# Altium PCB PCB1.PcbDoc
Units mil, origin at the board's own origin, x right, y up, seen from the top; angles counter-clockwise.
Board outline 3458.09 x 3082.9 mil, 2 copper layers (Top Layer, Bottom Layer); 35 components, 1 nets, 214 pads, 5 vias.
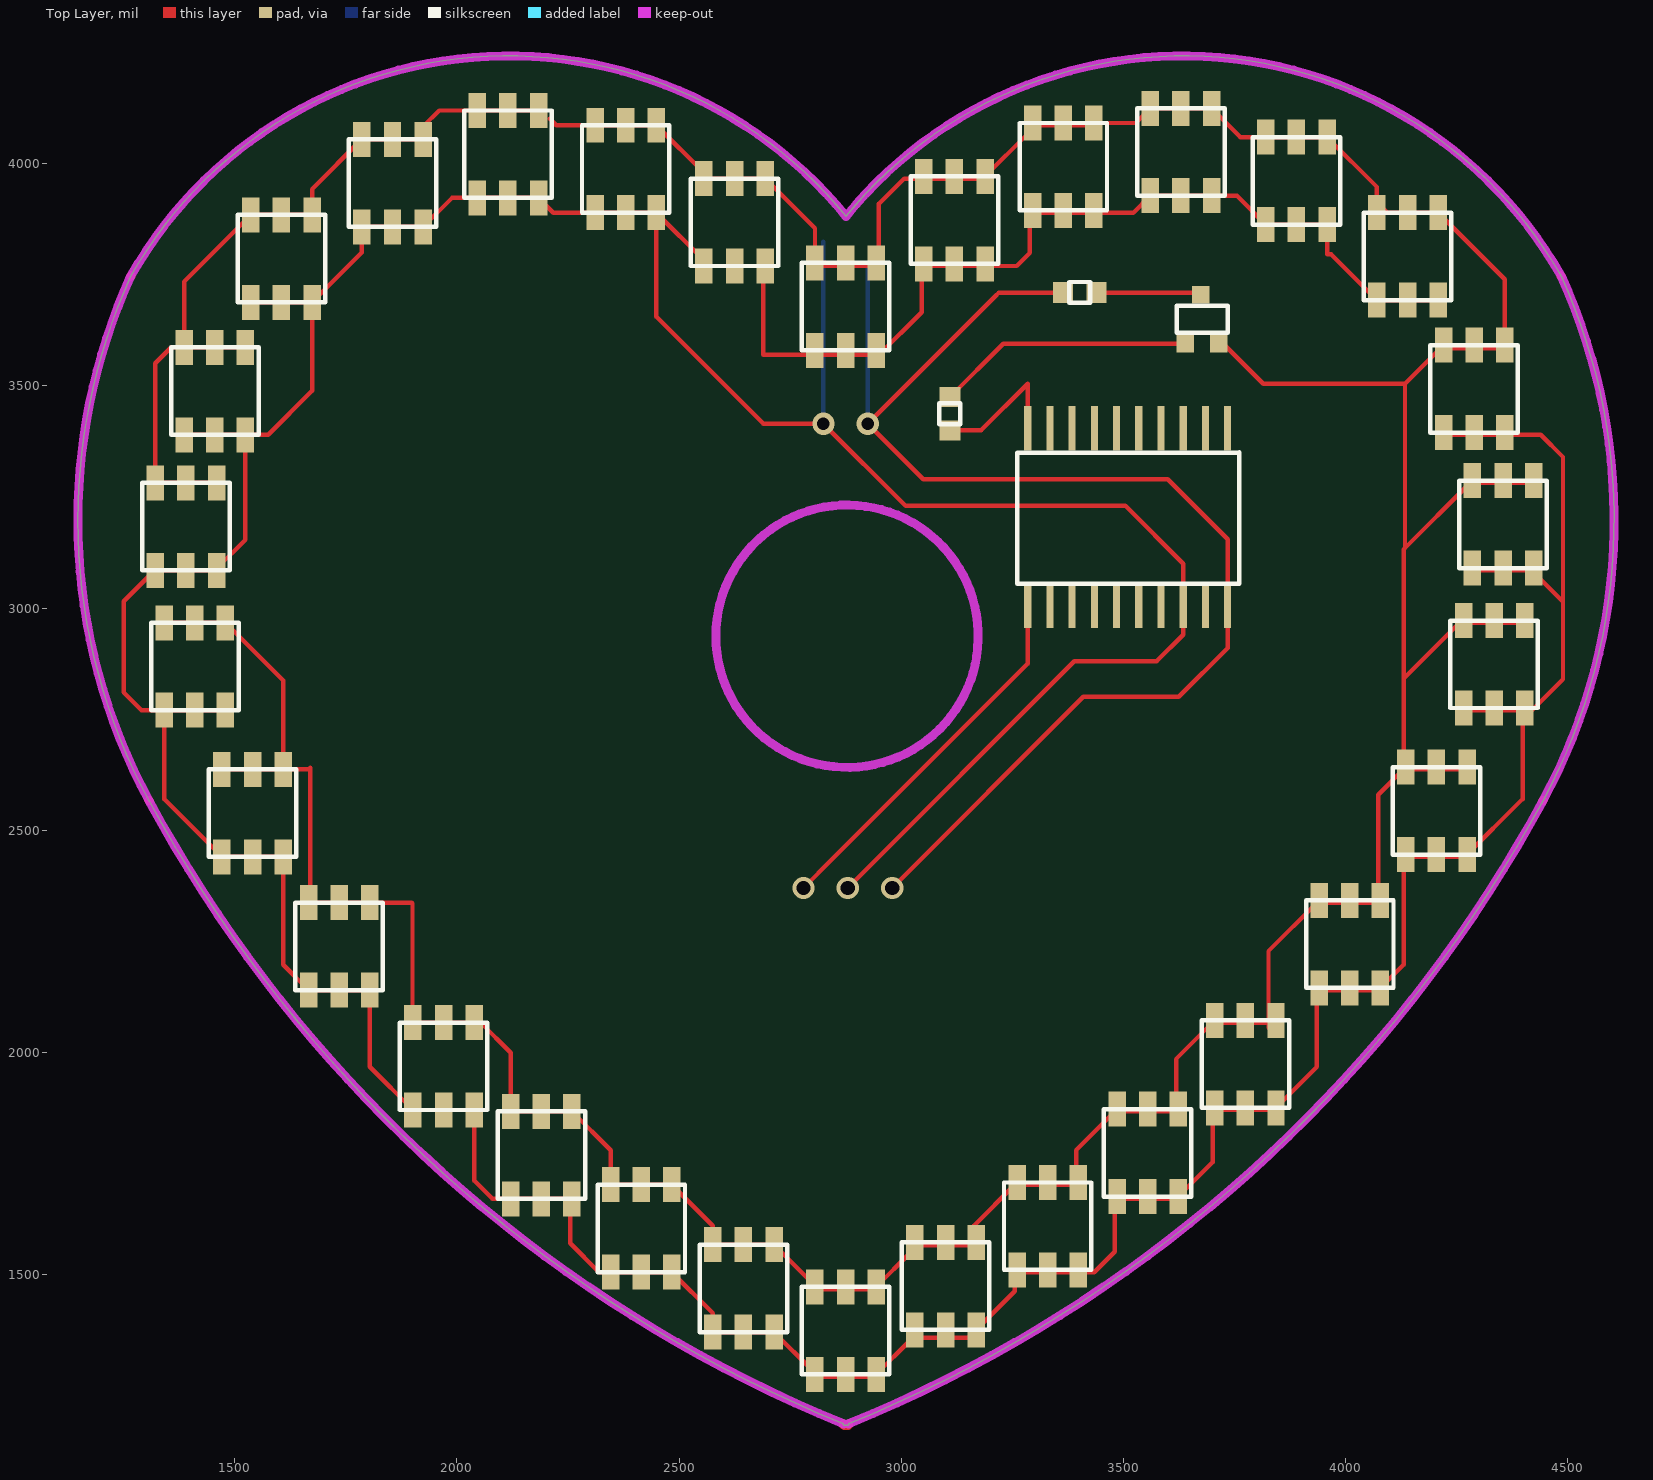
[diagram p0: Top Layer view]
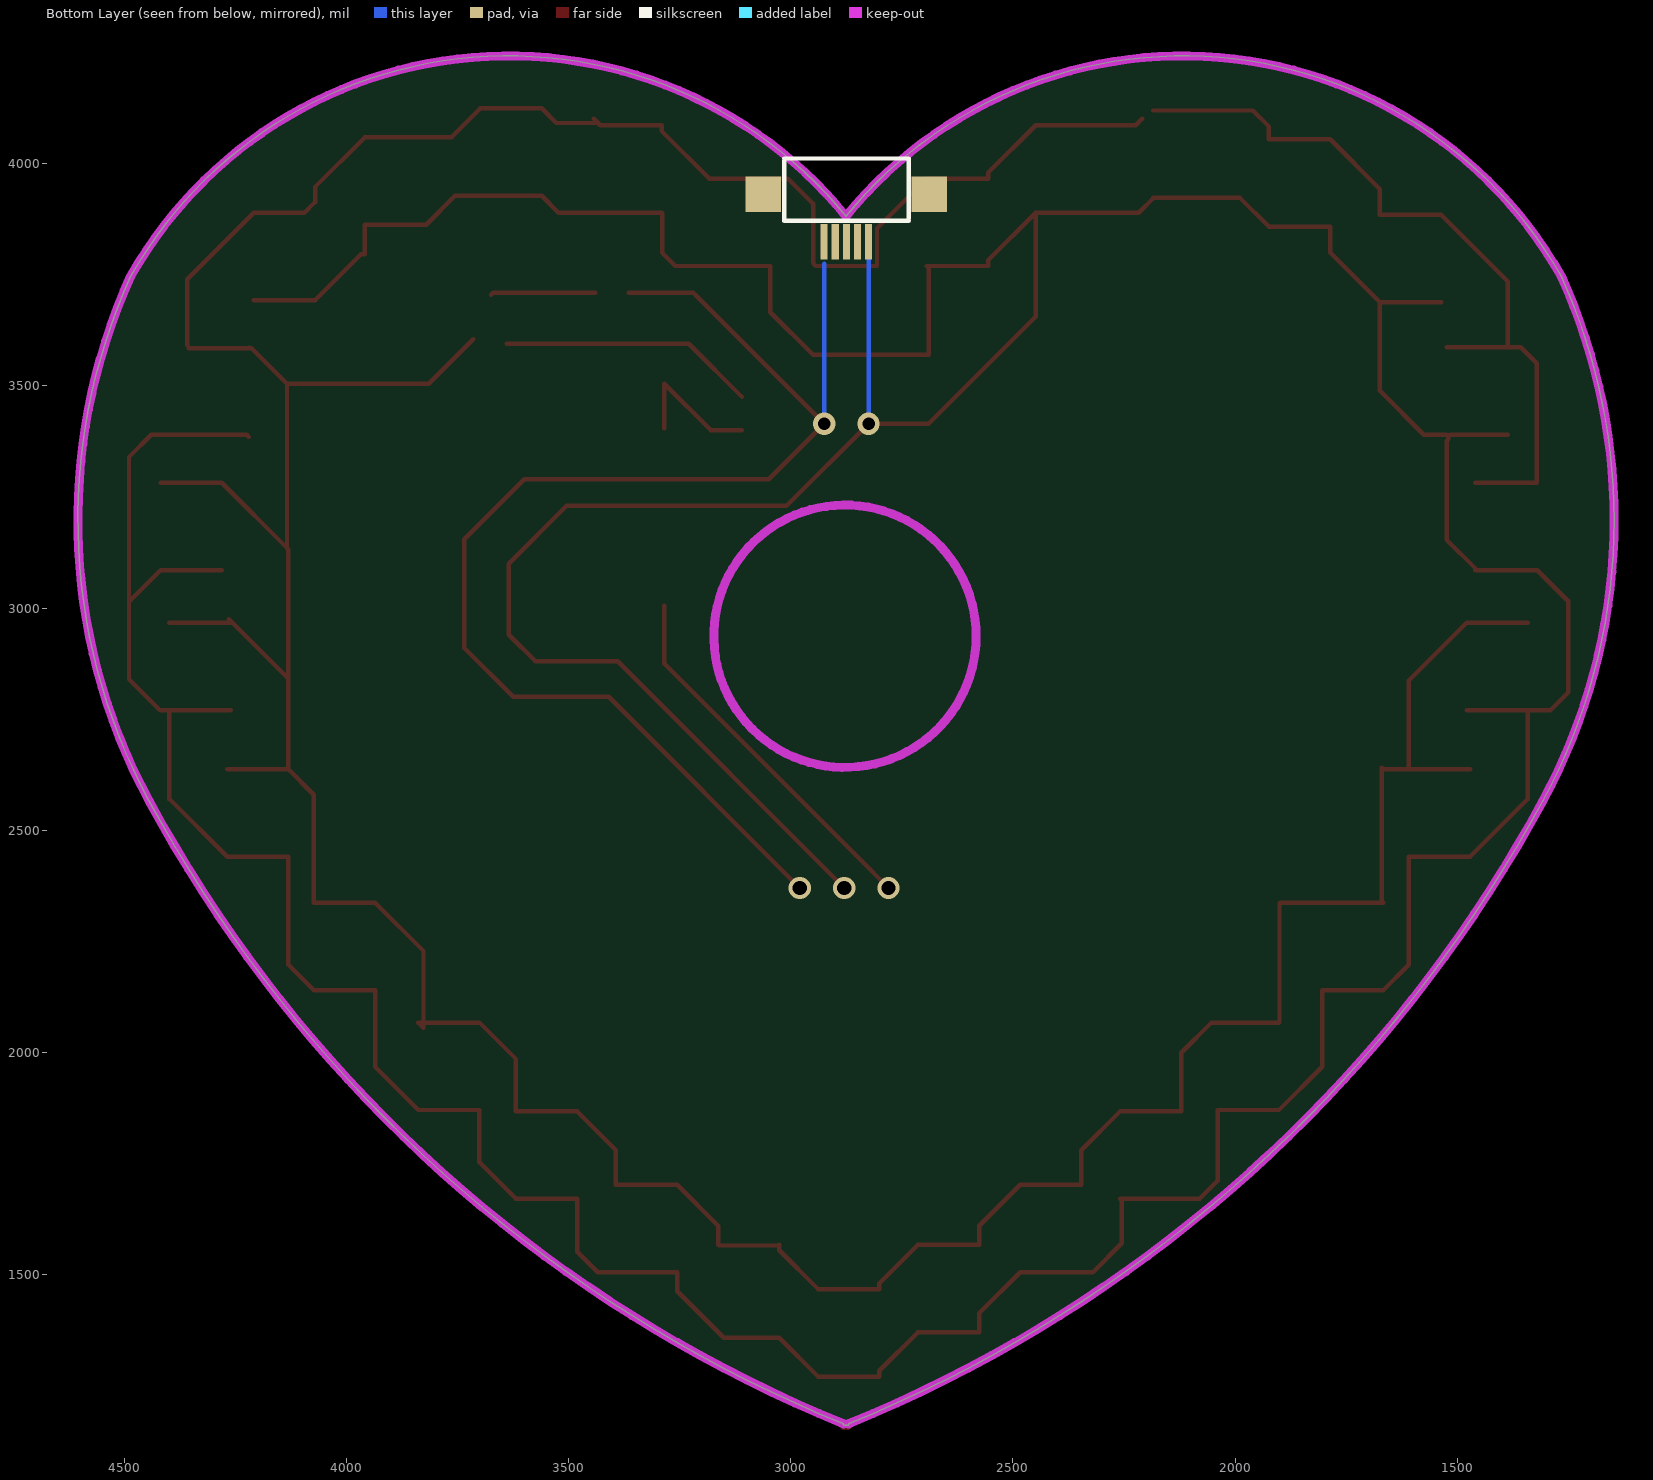
[diagram p1: Bottom Layer view, seen from below]

## Layer stack, top to bottom
Top Solder: solder mask 0.4, Solder Resist, Dk 3.5
Top Layer: signal copper 1.4
Dielectric 1: dielectric 12.6, FR-4, Dk 4.8
Bottom Layer: signal copper 1.4
Bottom Solder: solder mask 0.4, Solder Resist, Dk 3.5

## Board outline
2881.63,1163.48 cw(c2879.31,1162.5) 2878.37,1160.17 cw(c4050.63,4051.44) 2875.94,1161.16 cw(c1701.24,4051.44) 2873.5,1160.17 cw(c2872.56,1162.5) 2870.04,1162.5 cw(c2872.56,1162.5) 2870.24,1163.48 cw(c4050.63,4051.44) 1306.74,2566.62 cw(c2473.23,3197.94) 1146.86,3197.94 cw(c2473.23,3197.94) 1265.97,3747.29 cw(c1268.26,3746.25) 1266.07,3747.49 cw(c2116.89,3264.74) 2875.94,3881.83 cw(c3634.98,3264.74) 4485.8,3747.49 cw(c4483.62,3746.25) 4485.9,3747.29 cw(c3278.64,3197.94) 4445.13,2566.62 cw(c1701.24,4051.44)

## Design rules (kind name [scope] priority, off if disabled: settings)
Clearance [All] p1: gap=10 ignorepadtopadclearanceinfootprint=FALSE except(0: Arc-Hole Track-Hole SMDPad-Hole THPad-Hole Via-Hole Fill-Hole Poly-Hole Region-Hole Text-Hole)
PolygonConnect [All] p1: connectstyle=Relief reliefconductorwidth=10 reliefentries=4 polygonreliefangle="90 Angle" airgapwidth=10
RoutingVias [All] p1: holewidth=28 width=50 viastyle="Through Hole" minholewidth=28 minwidth=50 maxholewidth=28 maxwidth=50
SolderMaskExpansion [All] p1: expansion=4
Width [All] p1: maxlimit=10 minlimit=10 preferedwidth=10
30 further rules are at their usual default settings.

## Components (designator, comment, footprint, x,y, rotation, side; value= is the part's Value field where it differs from the comment)
? "Comment" PCBComponent_1#1 3066,3541.2 r270 top
? "Comment" PCBComponent_1#1 3506,3754 r180 top
? "Comment" PCBComponent_1#2 3240,4116.3 r180 bottom
? "Comment" "LED 5050"#1 2526.57,3770 r90 top
? "Comment" "LED 5050"#1 2281.57,3890 r90 top
? "Comment" "LED 5050"#1 2016.57,3923.15 r90 top
? "Comment" "LED 5050"#1 1756.57,3858.15 r90 top
? "Comment" "LED 5050"#1 1506.57,3688.15 r90 top
? "Comment" "LED 5050"#1 1356.57,3390 r90 top
? "Comment" "LED 5050"#1 1291.57,3085 r90 top
? "Comment" "LED 5050"#1 1311.57,2770 r90 top
? "Comment" "LED 5050"#1 1441.57,2440 r90 top
? "Comment" "LED 5050"#1 1636.57,2140 r90 top
? "Comment" "LED 5050"#1 1871.57,1870 r90 top
? "Comment" "LED 5050"#1 2091.57,1670 r90 top
? "Comment" "LED 5050"#1 2316.57,1505 r90 top
? "Comment" "LED 5050"#1 2546.57,1370 r90 top
? "Comment" PCBComponent_1#3 3750,3620 r180 top
? "Comment" "LED 5050"#2 3198.43,1375 r90 top
? "Comment" "LED 5050"#2 3428.43,1510 r90 top
? "Comment" "LED 5050"#2 3653.43,1675 r90 top
? "Comment" "LED 5050"#2 3873.43,1875 r90 top
? "Comment" "LED 5050"#2 4108.43,2145 r90 top
? "Comment" "LED 5050"#2 4303.43,2445 r90 top
? "Comment" "LED 5050"#2 4433.43,2775 r90 top
? "Comment" "LED 5050"#2 4453.43,3090 r90 top
? "Comment" "LED 5050"#2 4388.43,3395 r90 top
? "Comment" "LED 5050"#2 4238.43,3693.15 r90 top
? "Comment" "LED 5050"#2 3988.43,3863.15 r90 top
? "Comment" "LED 5050"#2 3728.43,3928.15 r90 top
? "Comment" "LED 5050"#2 3463.43,3895 r90 top
? "Comment" "LED 5050"#2 3218.43,3775 r90 top
? "Comment" "LED 5050"#1 2776.57,3580 r90 top
? "Comment" "LED 5050"#1 2776.57,1275 r90 top
? "Comment" STC15W408AS 3761,3055 r180 top

## Footprints (in the part's own frame and the unit in brackets; to place one, negate y for a bottom-side part, rotate by r counter-clockwise, add the part's x,y. Pads: shape width x height; smd on the part's side, far side on the other; paste and mask are expansions set on the pad)
"LED 5050"#1 [mm]
  rect 2x1 smd: 1(0,-0.75) 1(0,-2.5) 1(0,-4.25) 1(5,-4.25) 1(5,-2.5) 1(5,-0.75)
  silkscreen extent 0,-5 5,0
"LED 5050"#2 [mm]
  rect 2x1 smd: 1(0,4.25) 1(0,2.5) 1(0,0.75) 1(5,0.75) 1(5,2.5) 1(5,4.25)
  silkscreen extent 0,0 5,5
PCBComponent_1#1 [mm]
  rect 1.14x1.2 smd: 86(1.676,1.118) 86(3.586,1.118)
  silkscreen extent 2.03,0.51 3.24,1.71
PCBComponent_1#2 [mm]
  rect 0.406x2.032 smd: 82(8.001,-7.399) 82(8.636,-7.399) 82(9.271,-7.399) 82(9.906,-7.399) 82(10.541,-7.399)
  rect 2.032x2.032 smd: 83(4.521,-4.699) 83(14.021,-4.699)
  silkscreen extent 5.71,-6.22 12.83,-2.65
PCBComponent_1#3 [mm]
  rect 1x1 smd: 89(0.889,0.635) 89(1.905,-2.159) 89(2.794,0.635)
  silkscreen extent 0.38,-1.52 3.3,0
STC15W408AS [mil]
  rect 16x100 smd: 0(26,50) 0(26,-350) 0(76,50) 0(76,-350) 0(126,50) 0(126,-350) 0(176,50) 0(176,-350) 0(226,50) 0(226,-350) 0(276,50) 0(276,-350) 0(326,50) 0(326,-350) 0(376,50) 0(376,-350) 0(426,50) 0(426,-350) 0(476,50) 0(476,-350)
  silkscreen extent 0,-295 500,0

## Via types
v1: diameter 50, hole 32, Top Layer to Bottom Layer, 3 vias
v2: diameter 50, hole 28, Top Layer to Bottom Layer, 2 vias

## Nets (pads, with @x,y where several pads share a name; then routed paths per layer and width w, separated by ;. In a path a pad name is that pad's centre, name@x,y a point inside that pad or via, vN(x,y) a via of type N, cw(c..) or ccw(c..) an arc to the next point about the centre after c; other vN are vias at no path point)
LED: ?.1@2943.9,1275
pads on no net: ?.0 ?.1@1321.1,3085 ?.1@1321.1,3281.85 ?.1@1341.1,2770 ?.1@1341.1,2966.85 ?.1@1386.1,3390 ?.1@1386.1,3586.85 ?.1@1390,3085 ?.1@1390,3281.85 ?.1@1410,2770 ?.1@1410,2966.85 ?.1@1455,3390 ?.1@1455,3586.85 ?.1@1458.9,3085 ?.1@1458.9,3281.85 ?.1@1471.1,2440 ?.1@1471.1,2636.85 ?.1@1478.9,2770 ?.1@1478.9,2966.85 ?.1@1523.9,3390 ?.1@1523.9,3586.85 ?.1@1536.1,3688.15 ?.1@1536.1,3885 ?.1@1540,2440 ?.1@1540,2636.85 ?.1@1605,3688.15 ?.1@1605,3885 ?.1@1608.9,2440 ?.1@1608.9,2636.85 ?.1@1666.1,2140 ?.1@1666.1,2336.85 ?.1@1673.9,3688.15 ?.1@1673.9,3885 ?.1@1735,2140 ?.1@1735,2336.85 ?.1@1786.1,3858.15 ?.1@1786.1,4055 ?.1@1803.9,2140 ?.1@1803.9,2336.85 ?.1@1855,3858.15 ?.1@1855,4055 ?.1@1901.1,1870 ?.1@1901.1,2066.85 ?.1@1923.9,3858.15 ?.1@1923.9,4055 ?.1@1970,1870 ?.1@1970,2066.85 ?.1@2038.9,1870 ?.1@2038.9,2066.85 ?.1@2046.1,3923.15 ?.1@2046.1,4120 ?.1@2115,3923.15 ?.1@2115,4120 ?.1@2121.1,1670 ?.1@2121.1,1866.85 ?.1@2183.9,3923.15 ?.1@2183.9,4120 ?.1@2190,1670 ?.1@2190,1866.85 ?.1@2258.9,1670 ?.1@2258.9,1866.85 ?.1@2311.1,3890 ?.1@2311.1,4086.85 ?.1@2346.1,1505 ?.1@2346.1,1701.85 ?.1@2380,3890 ?.1@2380,4086.85 ?.1@2415,1505 ?.1@2415,1701.85 ?.1@2448.9,3890 ?.1@2448.9,4086.85 ?.1@2483.9,1505 ?.1@2483.9,1701.85 ?.1@2556.1,3770 ?.1@2556.1,3966.85 ?.1@2576.1,1370 ?.1@2576.1,1566.85 ?.1@2625,3770 ?.1@2625,3966.85 ?.1@2645,1370 ?.1@2645,1566.85 ?.1@2693.9,3770 ?.1@2693.9,3966.85 ?.1@2713.9,1370 ?.1@2713.9,1566.85 ?.1@2806.1,1275 ?.1@2806.1,1471.85 ?.1@2806.1,3580 ?.1@2806.1,3776.85 ?.1@2875,1275 ?.1@2875,1471.85 ?.1@2875,3580 ?.1@2875,3776.85 ?.1@2943.9,1471.85 ?.1@2943.9,3580 ?.1@2943.9,3776.85 ?.1@3031.1,1375 ?.1@3031.1,1571.85 ?.1@3051.1,3775 ?.1@3051.1,3971.85 ?.1@3100,1375 ?.1@3100,1571.85 ?.1@3120,3775 ?.1@3120,3971.85 ?.1@3168.9,1375 ?.1@3168.9,1571.85 ?.1@3188.9,3775 ?.1@3188.9,3971.85 ?.1@3261.1,1510 ?.1@3261.1,1706.85 ?.1@3296.1,3895 ?.1@3296.1,4091.85 ?.1@3330,1510 ?.1@3330,1706.85 ?.1@3365,3895 ?.1@3365,4091.85 ?.1@3398.9,1510 ?.1@3398.9,1706.85 ?.1@3433.9,3895 ?.1@3433.9,4091.85 ?.1@3486.1,1675 ?.1@3486.1,1871.85 ?.1@3555,1675 ?.1@3555,1871.85 ?.1@3561.1,3928.15 ?.1@3561.1,4125 ?.1@3623.9,1675 ?.1@3623.9,1871.85 ?.1@3630,3928.15 ?.1@3630,4125 ?.1@3698.9,3928.15 ?.1@3698.9,4125 ?.1@3706.1,1875 ?.1@3706.1,2071.85 ?.1@3775,1875 ?.1@3775,2071.85 ?.1@3821.1,3863.15 ?.1@3821.1,4060 ?.1@3843.9,1875 ?.1@3843.9,2071.85 ?.1@3890,3863.15 ?.1@3890,4060 ?.1@3941.1,2145 ?.1@3941.1,2341.85 ?.1@3958.9,3863.15 ?.1@3958.9,4060 ?.1@4010,2145 ?.1@4010,2341.85 ?.1@4071.1,3693.15 ?.1@4071.1,3890 ?.1@4078.9,2145 ?.1@4078.9,2341.85 ?.1@4136.1,2445 ?.1@4136.1,2641.85 ?.1@4140,3693.15 ?.1@4140,3890 ?.1@4205,2445 ?.1@4205,2641.85 ?.1@4208.9,3693.15 ?.1@4208.9,3890 ?.1@4221.1,3395 ?.1@4221.1,3591.85 ?.1@4266.1,2775 ?.1@4266.1,2971.85 ?.1@4273.9,2445 ?.1@4273.9,2641.85 ?.1@4286.1,3090 ?.1@4286.1,3286.85 ?.1@4290,3395 ?.1@4290,3591.85 ?.1@4335,2775 ?.1@4335,2971.85 ?.1@4355,3090 ?.1@4355,3286.85 ?.1@4358.9,3395 ?.1@4358.9,3591.85 ?.1@4403.9,2775 ?.1@4403.9,2971.85 ?.1@4423.9,3090 ?.1@4423.9,3286.85 ?.82 ?.83 ?.86 ?.89
copper on no net: | length 32195.7
  Top Layer w0: 4216.1,3581.1 4216.1,3586.85 4219.25,3590
  Top Layer w10: 1341.1,2966.85 1478.9,2966.85 1608.9,2836.85 1608.9,2636.85 ; 1386.1,3390 1516.1,3390 1520,3386.1 1520,3380 1523.9,3376.1 1523.9,3153.9 1458.9,3088.9 1458.9,3085 1320,3085 1250,3015 1250,2810 1290,2770 1341.1,2770 ; 1458.9,3281.85 1321.1,3281.85 1321.1,3551.1 1356.85,3586.85 1386.1,3586.85 ; 1471.1,2636.85 1666.85,2636.85 1670,2640 1670,2340.75 1666.1,2336.85 1898.15,2336.85 1900,2335 1900,2067.95 1901.1,2066.85 2038.9,2066.85 2053.15,2066.85 2121.1,1998.9 2121.1,1866.85 2258.9,1866.85 2346.1,1779.65 2346.1,1701.85 2483.9,1701.85 2576.1,1609.65 2576.1,1566.85 2713.9,1566.85 2801.1,1479.65 2801.1,1466.85 2870,1466.85 2938.9,1466.85 3026.1,1554.06 3026.1,1566.85 3027.95,1565 3162.05,1565 3163.9,1566.85 3163.9,1609.65 3256.1,1701.85 3393.9,1701.85 3393.9,1779.65 3481.1,1866.85 3618.9,1866.85 3618.9,1984.65 3701.1,2066.85 3838.9,2066.85 3827.05,2055 3827.05,2227.8 3936.1,2336.85 4073.9,2336.85 4073.9,2579.65 4131.1,2636.85 ; 1478.9,2770 1341.1,2770 ; 1523.9,3586.85 1386.1,3586.85 ; 1536.1,3688.15 1673.9,3688.15 ; 1545,3390 1523.9,3390 1575,3390 1673.9,3488.9 1673.9,3688.15 ; 2183.9,4120 1960,4120 1923.9,4083.9 1923.9,4055 1786.1,4055 1673.9,3942.8 1673.9,3885 1536.1,3885 1386.1,3735 1386.1,3586.85 ; 2208.9,4101.85 2223.9,4086.85 2311.1,4086.85 2448.9,4086.85 2556.1,3979.65 2556.1,3966.85 2693.9,3966.85 2806.1,3854.65 2806.1,3770 2943.9,3770 2950,3776.1 2950,3910 3006.85,3966.85 3046.1,3966.85 3183.9,3966.85 3291.1,4074.06 3291.1,4086.85 3428.9,4086.85 3443.9,4101.85 ; 2448.9,3753.9 2448.9,3890 ; 2448.9,3760 2448.9,3656.1 2690,3415 v2(2825,3415) 3010,3230 3505,3230 3635,3100 3635,3005 3635,2940 3575,2880 3390,2880 v1(2880,2370) ; v1(2780,2370) 2845,2435 3285,2875 3285,3005 ; 2870,1270 2938.9,1270 ; v1(2980,2370) 3410,2800 3625,2800 3735,2910 3735,3005 3735,3155 3600,3290 3050,3290 v2(2925,3415) 3215,3705 ; 3110,3400 3180,3400 3285,3505 3285,3405 ; 3110,3475.2 3229.8,3595 3295,3595 3640,3595 ; 3220,3710 3364.8,3710 ; 3433.9,4091.85 3527.95,4091.85 3561.1,4125 3698.9,4125 3763.9,4060 3821.1,4060 3958.9,4060 4071.1,3947.8 4071.1,3913.9 4095,3890 4208.9,3890 4358.9,3740 4358.9,3591.85 ; 3440,3710 3670,3710 3675,3705 ; 3715,3605 3815,3505 4134.25,3505 ; 4134.25,3135 4134.25,3499.25 4134.25,3505 ; 4208.9,3693.15 4071.1,3693.15 3968.15,3796.1 3958.9,3796.1 3958.9,3863.15 3821.1,3863.15 3756.1,3928.15 3698.9,3928.15 3561.1,3928.15 3522.95,3890 3428.9,3890 3291.1,3890 3290,3888.9 3290,3800 3260,3770 3183.9,3770 3046.1,3770 3046.1,3666.1 2950,3570 2695,3570 2690,3570 2690,3766.1 2693.9,3770 2625,3770 2556.1,3770 2556.1,3782.8 2448.9,3890 ; 4220,3385 4225,3390 4440,3390 4490,3340 4490,3013.9 ; 4261.1,2770 4398.9,2770 ; 4261.1,2966.85 4398.9,2966.85 ; 4265,2975 4131.1,2841.1 ; 4268.9,2636.85 4131.1,2636.85 ; 4281.1,3085 4418.9,3085 4490,3013.9 ; 4355,3585 4214.25,3585 4134.25,3505 ; 4418.9,3281.85 4281.1,3281.85 4131.1,3131.85 4131.1,2841.1 ; 1341.1,2770 1341.1,2570 1471.1,2440 1608.9,2440 1608.9,2197.2 1666.1,2140 1803.9,2140 1803.9,1967.2 1901.1,1870 2038.9,1870 2038.9,1711.1 2080,1670 2121.1,1670 2258.9,1670 2255,1666.1 2255,1570 2320,1505 2346.1,1505 2483.9,1505 2576.1,1412.8 2576.1,1370 2713.9,1370 2801.1,1282.8 2801.1,1270 2938.9,1270 ; 1673.9,3688.15 1786.1,3800.35 1786.1,3858.15 1923.9,3858.15 1988.9,3923.15 2046.1,3923.15 2183.9,3923.15 2217.05,3890 2311.1,3890 2380,3890 2448.9,3890 ; 2938.9,1270 3026.1,1357.2 3151.1,1357.2 3256.1,1462.2 3256.1,1505 3435,1505 3481.1,1551.1 3481.1,1670 3618.9,1670 3701.1,1752.2 3701.1,1870 3838.9,1870 3936.1,1967.2 3936.1,2140 4073.9,2140 4131.1,2197.2 4131.1,2440 4268.9,2440 4398.9,2570 4398.9,2770 ; 4131.1,2636.85 4131.1,2841.1 ; 4398.9,2770 4420,2770 4490,2840 4490,3013.9
  Top Layer w20: 1265.97,3747.29 cw(c1268.26,3746.25) 1266.07,3747.49 ; 2870.24,1163.48 ccw(c2872.56,1162.5) 2870.04,1162.5 ccw(c2872.56,1162.5) 2873.5,1160.17 ccw(c1701.24,4051.44) 2875.94,1161.16 ccw(c4050.63,4051.44) 2878.37,1160.17 ccw(c2879.31,1162.5) 2881.63,1163.48 ; 4485.8,3747.49 cw(c4483.62,3746.25) 4485.9,3747.29
  Bottom Layer w10: v2@2825,3430 2825,3825 ; v2@2925,3430 2925,3775

## Keep-outs
Keep-Out Layer:
  lines w20: 1265.96,3747.28 ccw(c2473.23,3197.94) 1146.86,3197.94 ccw(c2473.23,3197.94) 1306.74,2566.61 ccw(c4050.63,4051.44) 2870.25,1163.47 ; 1266.07,3747.49 cw(c2116.89,3264.74) 2875.93,3881.84 cw(c3634.98,3264.74) 4485.8,3747.49 ; 2772.16,2661.08 cw(c2878.25,2936.64) 2775,2660 ; 2881.62,1163.47 ccw(c1701.24,4051.44) 4445.12,2566.59 ; 4445.13,2566.61 ccw(c3278.64,3197.94) 4485.91,3747.28